# Altium PCB PCB1.PcbDoc (part 1 of 2)
Units mm, origin at the board's own origin, x right, y up, seen from the top; angles counter-clockwise.
Board outline 54 x 42.04 mm, 4 copper layers (Top Layer, Int1 (GND), Int2 (PWR), Bottom Layer), stack 1.527 mm thick; 51 components, 50 nets, 220 pads, 98 vias.
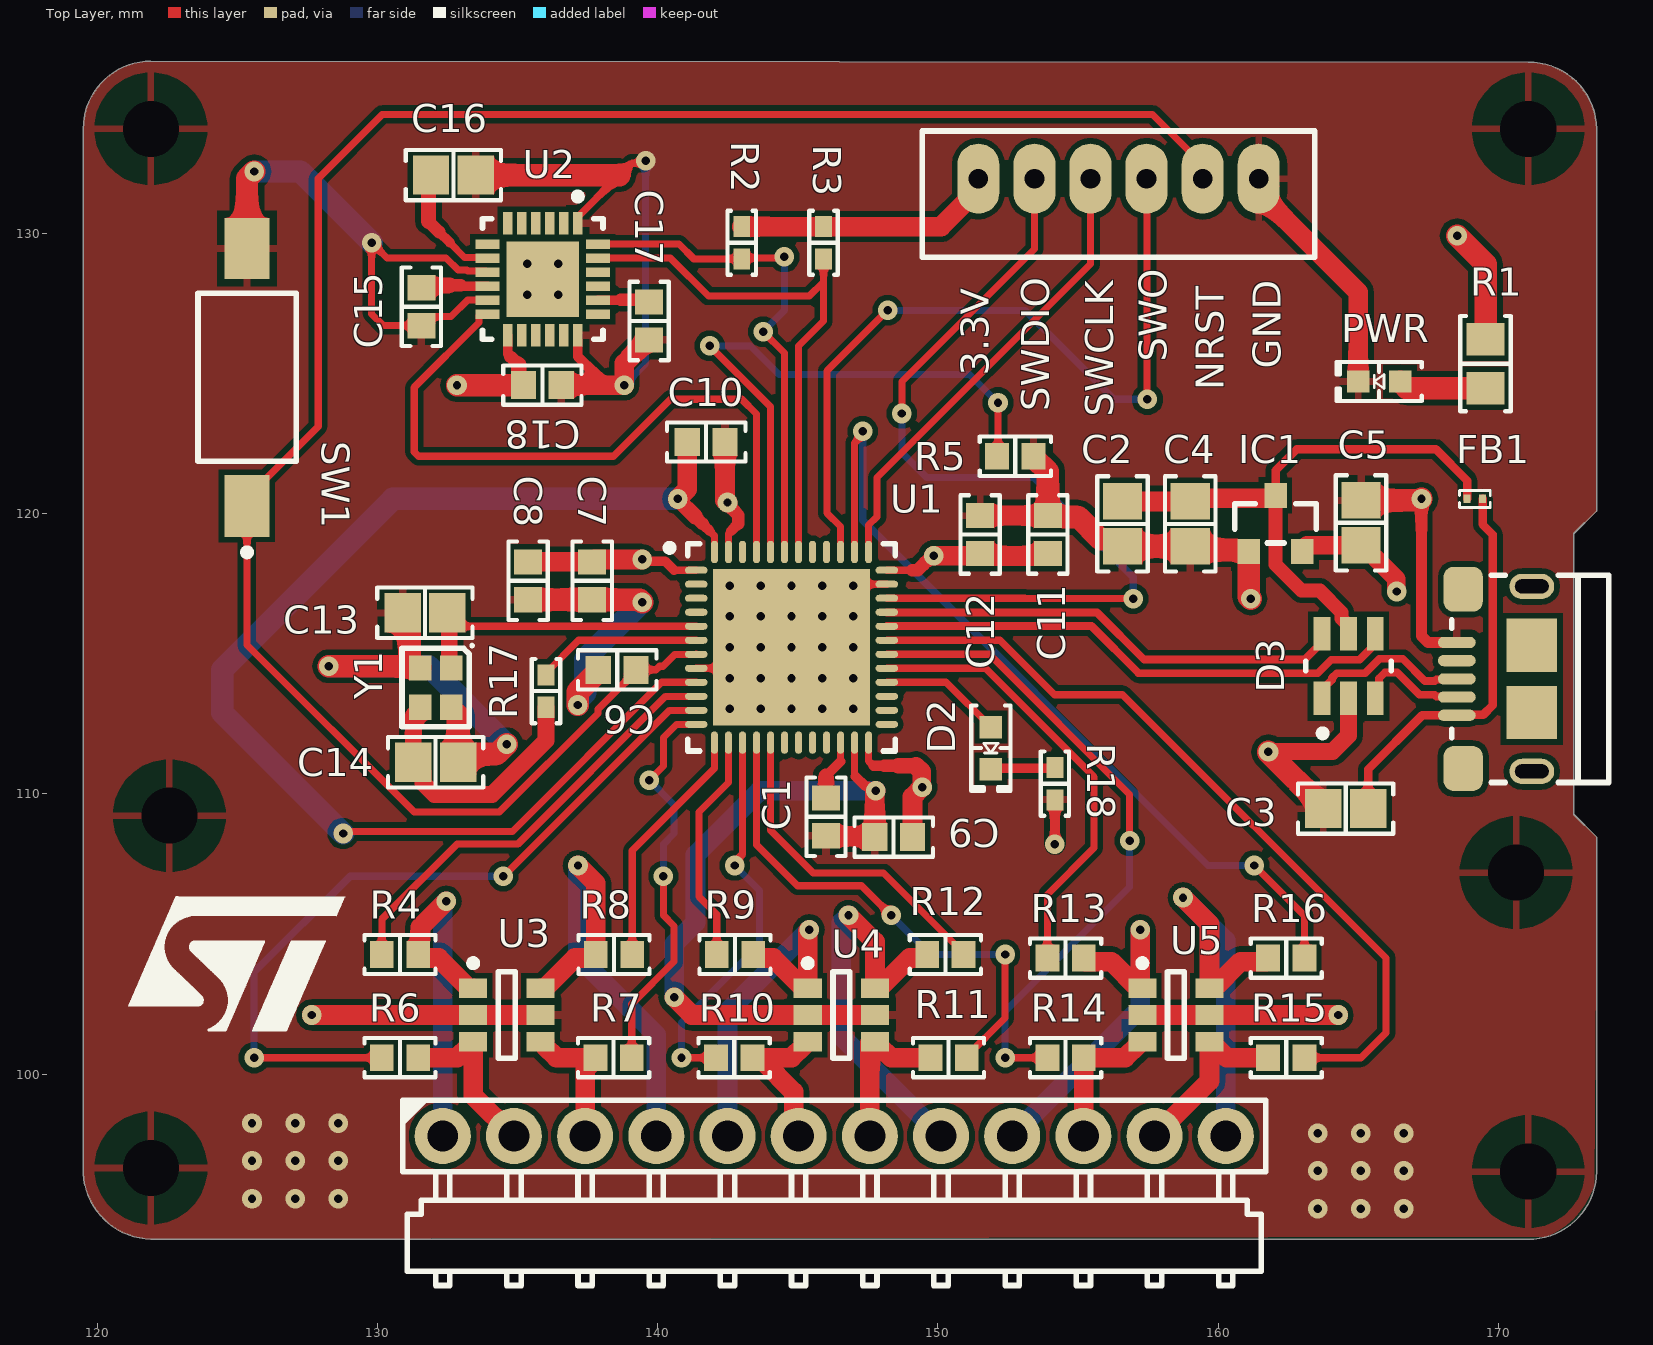
[diagram p0: Top Layer view]
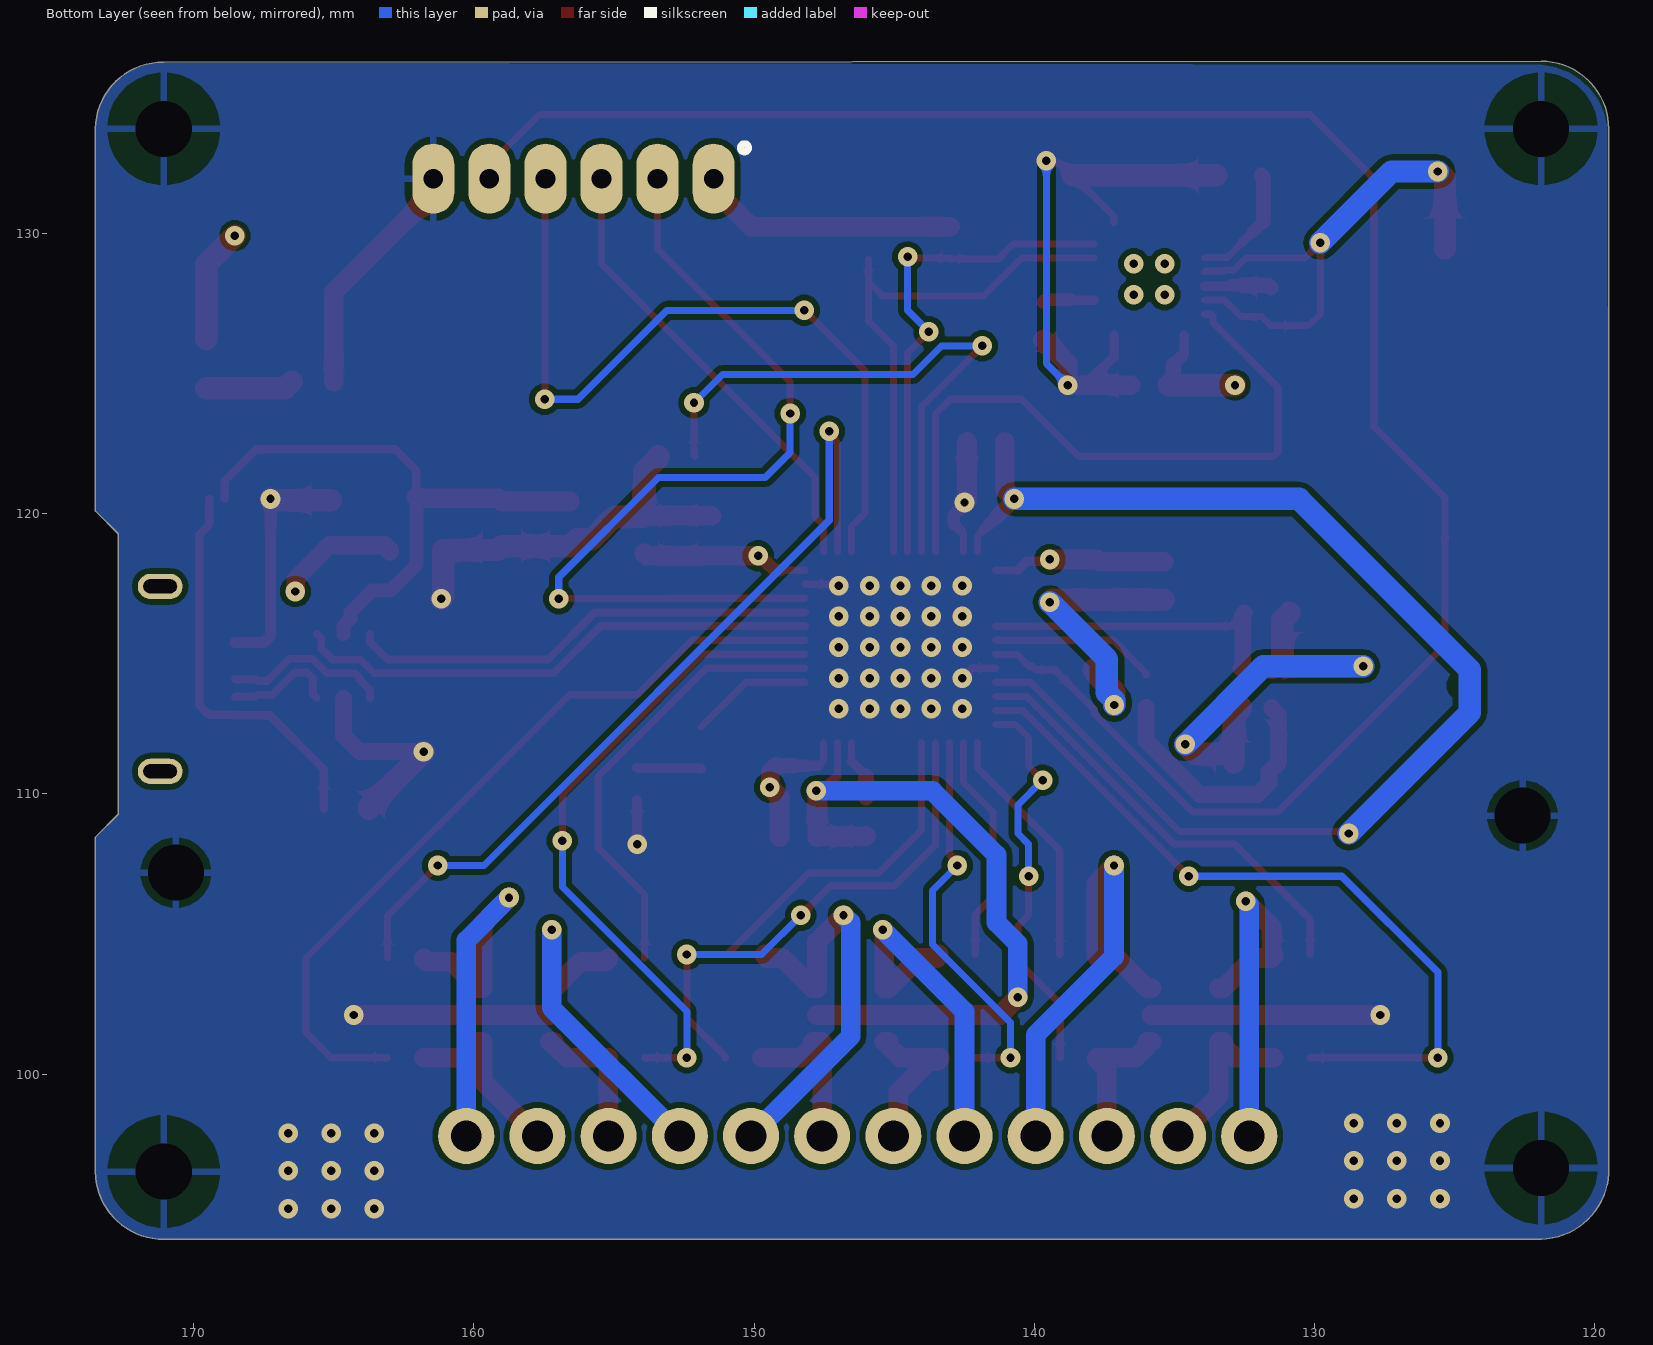
[diagram p1: Bottom Layer view, seen from below]
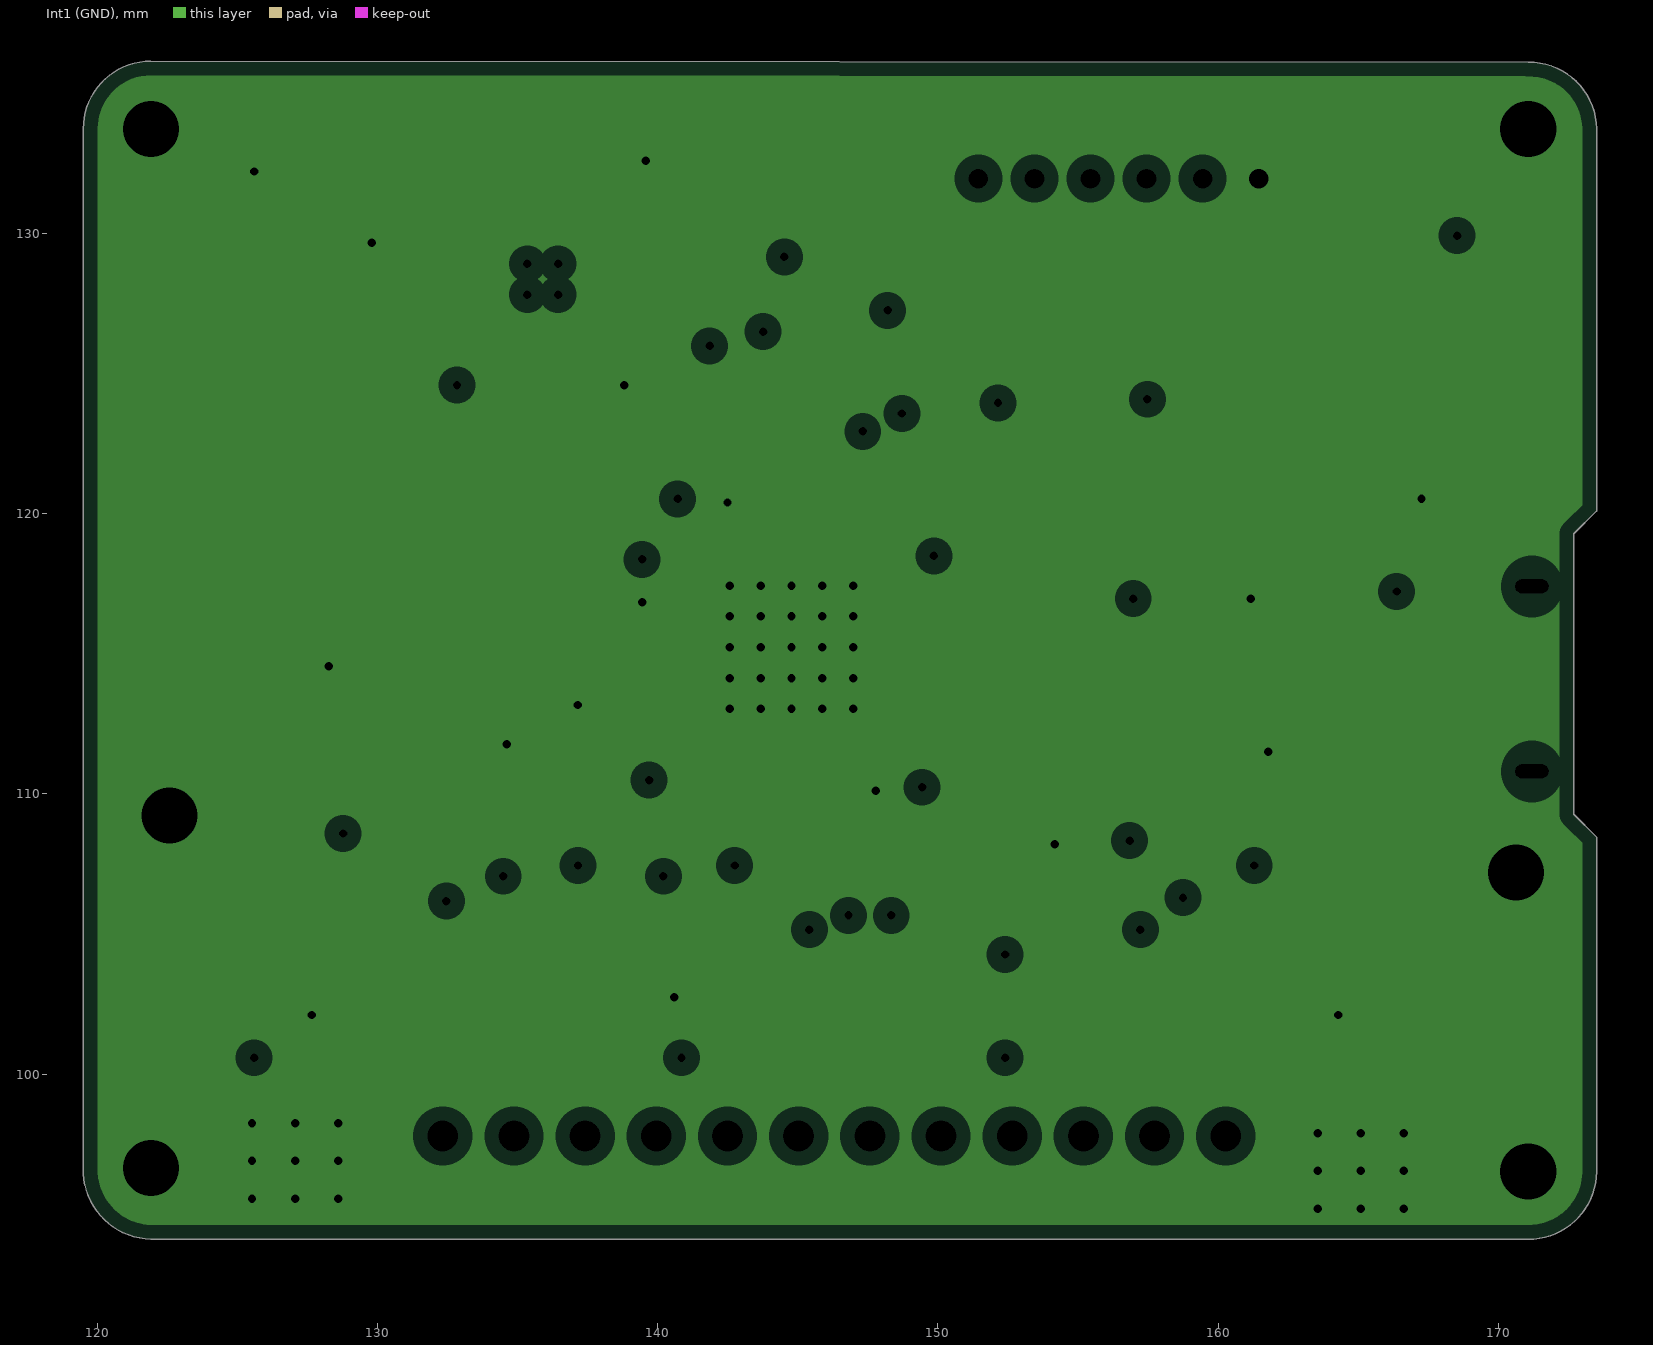
[diagram p2: Int1 (GND), clearances drawn from the general rule]
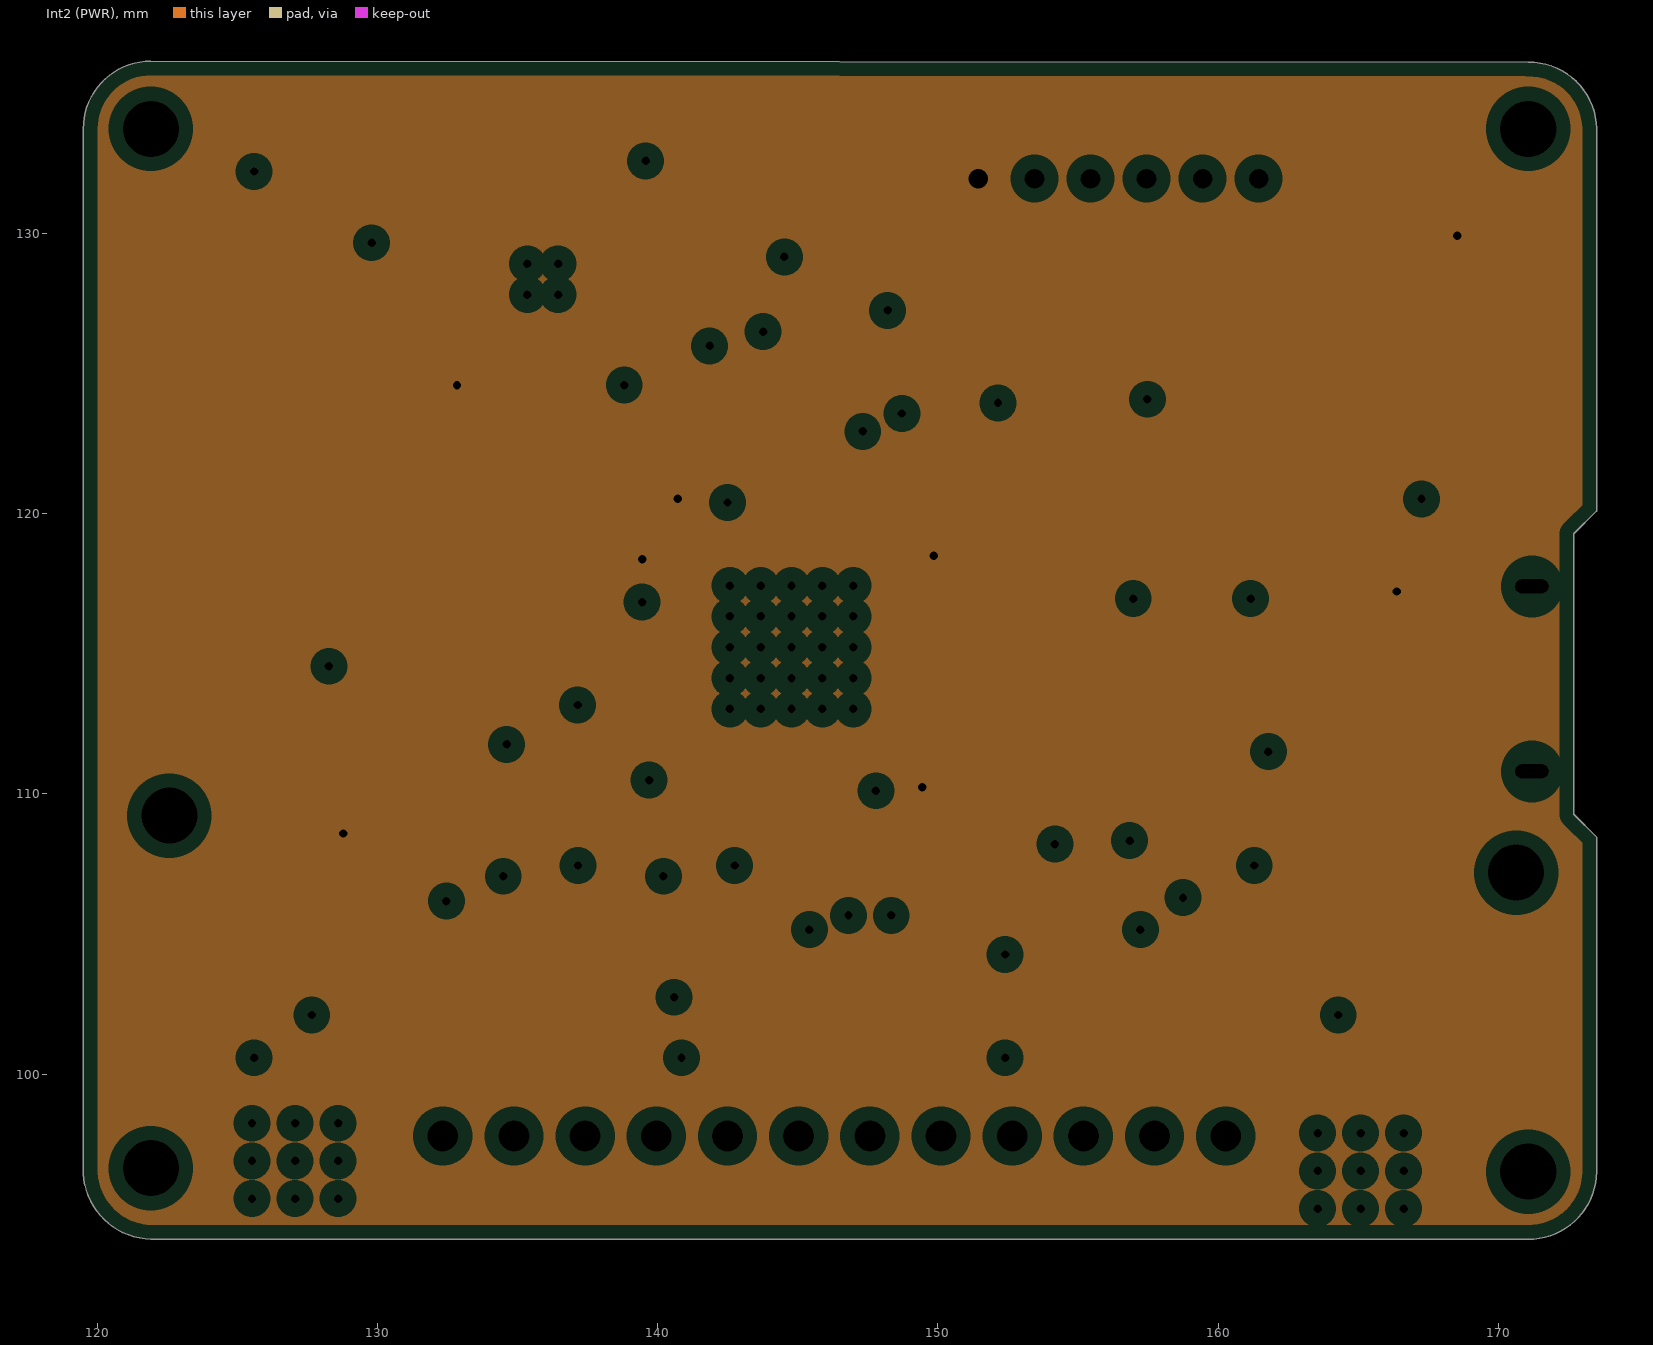
[diagram p3: Int2 (PWR), clearances drawn from the general rule]

## Layer stack, top to bottom
Top Solder: solder mask 0.0254, SM-001, Dk 4
Top Layer: signal copper 0.0175
Dielectric 2: prepreg 0.196, PP-017, Dk 4.56
Int1 (GND): plane copper 0.035, net GND
Dielectric 3: core 1.03, Core-039, Dk 4.6
Int2 (PWR): plane copper 0.035, net +3.3
Dielectric 4: prepreg 0.196, PP-017, Dk 4.56
Bottom Layer: signal copper 0.0175
Bottom Solder: solder mask 0.0254, SM-001, Dk 4

## Board outline
119.507,96.647 119.507,133.731 cw(c121.92,133.731) 121.92,136.144 171.069,136.107 cw(c171.1,133.7) 173.507,133.731 173.507,120.091 172.695,119.278 172.695,109.271 173.507,108.458 173.507,96.52 cw(c171.082,96.532) 171.069,94.107 121.92,94.107 cw(c121.983,96.584)

## Design rules (kind name [scope] priority, off if disabled: settings)
Clearance [All] p1: gap=0.2 ignorepadtopadclearanceinfootprint=FALSE except(0: Arc-Hole Track-Hole SMDPad-Hole THPad-Hole Via-Hole Fill-Hole Poly-Hole Region-Hole Text-Hole; 0.15: Arc-SMDPad Track-SMDPad SMDPad-SMDPad; 0.3: Arc-THPad Track-THPad SMDPad-THPad THPad-THPad)
DiffPairsRouting [All] p1: maxlimit=0.203 minlimit=0.203 mostfreqgap=0.203 toplayer_minwidth=0.282 toplayer_maxwidth=0.282 toplayer_prefwidth=0.282 bottomlayer_minwidth=0.282 bottomlayer_maxwidth=0.282 bottomlayer_prefwidth=0.282 impedanceprofiledriven=TRUE impedanceprofileid={8CF5B2EE-CE53-4D16-A48A-B350567C6581} impedanceprofilevalue=90.000000 maxuncoupledlength=12.7
HoleSize [All] p1: absolutevalues=TRUE maxlimit=3.5 minlimit=0.025 maxpercent=80.000 minpercent=20.000
MinimumSolderMaskSliver [All] p1: minsoldermaskwidth=0.04
PlaneClearance [All] p1: clearance=0.508
PlaneConnect [All] p1: pad.planeconnectstyle=Relief pad.reliefexpansion=0.508 pad.reliefentries=4 pad.reliefconductorwidth=0.254 pad.reliefairgap=0.254 via.planeconnectstyle=Direct via.reliefexpansion=0.508 via.reliefentries=4 via.reliefconductorwidth=0.254 via.reliefairgap=0.254
PolygonConnect [All] p1: thpad.connectstyle=Relief thpad.reliefconductorwidth=0.254 thpad.reliefentries=4 thpad.polygonreliefangle="90 Angle" thpad.airgapwidth=0.254 smdpad.connectstyle=Relief smdpad.reliefconductorwidth=0.254 smdpad.reliefentries=4 smdpad.polygonreliefangle="90 Angle" smdpad.airgapwidth=0.254 via.connectstyle=Direct via.reliefconductorwidth=0.254 via.reliefentries=4 via.polygonreliefangle="90 Angle" via.airgapwidth=0.254
RoutingVias [All] p1: holewidth=0.3 width=0.7 viastyle="Through Hole" minholewidth=0.25 minwidth=0.6 maxholewidth=0.3 maxwidth=0.7
SilkToSolderMaskClearance [IsPad] p1: minsilkscreentomaskgap=0 clearancetoexposedcopper=TRUE
SolderMaskExpansion [All] p1: expansion=0.102 istentingtop=FALSE
UnRoutedNet [All] p1: checkbadconnections=TRUE
Width [All] p1: maxlimit=1 minlimit=0.2 preferedwidth=0.3
23 further rules are at their usual default settings.

## Classes and differential pairs
differential pair USB_D: +USB_D_P -USB_D_N
differential pair USB_D_IN: +USB_D_IN_P -USB_D_IN_N

## Components (designator, comment, footprint, x,y, rotation, side; value= is the part's Value field where it differs from the comment)
C1 "100nf" "CAP 0603_1608" 146.01,109.18 r270 top
C2 "2C2uF" "CAP 0805_2012" 156.591,119.634 r90 top
C3 "2C2uF" "CAP 0805_2012" 164.554,109.474 r0 top
C4 "1uF" "CAP 0805_2012" 159.004,119.634 r270 top
C5 "1uF" "CAP 0805_2012" 165.1,119.672 r90 top
C6 "100nf" "CAP 0603_1608" 138.557,114.427 r180 top
C7 "4C7uf" "CAP 0603_1608" 137.668,117.602 r270 top
C8 "100nf" "CAP 0603_1608" 135.382,117.602 r270 top
C9 "100nf" "CAP 0603_1608" 148.423,108.458 r180 top
C10 "100nf" "CAP 0603_1608" 141.732,122.555 r0 top
C11 "100nf" "CAP 0603_1608" 153.924,119.253 r90 top
C12 "100nf" "CAP 0603_1608" 151.511,119.253 r90 top
C13 "6 pF" "CAP 0805_2012" 131.699,116.459 r180 top
C14 "6 pF" "CAP 0805_2012" 132.08,111.125 r0 top
C15 "0C1uF" "CAP 0603_1608" 131.572,127.381 r270 top
C16 "10nF" "CAP 0805_2012" 132.715,132.08 r0 top
C17 "2C2nF" "CAP 0603_1608" 139.7,126.873 r270 top
C18 "0C1uF" "CAP 0603_1608" 135.89,124.587 r0 top
D2 "Green" "LED 0603_1608 GREEN" 151.892,111.633 r270 top
D3 "USBLC6-4SC6" FP-SOT23-6L-MFG 164.658,114.561 r90 top value=3pF
FB1 "33 Ohms @ 100 MHz" "FER 0201_0603" 169.164,120.523 r0 top
IC1 "AP7313-33SRG-7" "DIODES SOT-23-3" 162.052,119.65 r90 top
J1 "10118193-0001LF" "FCI USB 10118193-0001LF" 171.146,114.103 r270 top
J2 "M20-9961245" "HARWIN M20-9961245" 146.304,97.79 r0 top
J3 "B6B-PH-K(LF)(SN)" "JST B6B-PH-K" 156.448,131.953 r0 top
PWR "Red" "LED 0603_1608 RED" 165.747,124.714 r180 top (schematic designator D1)
R1 "1 kOhms" "RES 0805_2012" 169.545,125.349 r270 top
R2 "4R75K" "RES 0402_1005" 143.002,129.667 r270 top
R3 "4R75K" "RES 0402_1005" 145.923,129.667 r270 top
R4 "150R" "RES 0603_1608" 130.81,104.267 r180 top
R5 "10KR" "RES 0603_1608" 152.766,122.047 r180 top
R6 "150R" "RES 0603_1608" 130.81,100.584 r180 top
R7 "150R" "RES 0603_1608" 138.43,100.584 r0 top
R8 "150R" "RES 0603_1608" 138.445,104.267 r0 top
R9 "150R" "RES 0603_1608" 142.763,104.267 r180 top
R10 "150R" "RES 0603_1608" 142.733,100.584 r180 top
R11 "150R" "RES 0603_1608" 150.383,100.584 r0 top
R12 "150R" "RES 0603_1608" 150.271,104.267 r0 top
R13 "150R" "RES 0603_1608" 154.559,104.14 r180 top
R14 "150R" "RES 0603_1608" 154.559,100.584 r180 top
R15 "150R" "RES 0603_1608" 162.433,100.584 r0 top
R16 "150R" "RES 0603_1608" 162.433,104.14 r0 top
R17 "150R" "RES 0402_1005" 136.017,113.665 r90 top
R18 "1K" "RES 0402_1005" 154.178,110.363 r270 top
SW1 "FSMSM" TECO-FSMSM-2_V 125.349,124.864 r90 top
U1 "STM32F411CEU6" STM-UFQFPN48_L 144.78,115.23 r0 top
U2 "MPU-6050" IS-QFN-24_V 135.902,128.365 r270 top
U3 "MMQA6V2T1G" ONSC-SC-74-6-318F-05_V 134.62,102.108 r0 top
U4 "MMQA6V2T1G" ONSC-SC-74-6-318F-05_V 146.558,102.108 r0 top
U5 "MMQA6V2T1G" ONSC-SC-74-6-318F-05_V 158.496,102.108 r0 top
Y1 "20MHz" "KYOCERA CX2016DB" 132.08,113.792 r270 top

## Footprints (in the part's own frame and the unit in brackets; to place one, negate y for a bottom-side part, rotate by r counter-clockwise, add the part's x,y. Pads: shape width x height; smd on the part's side, far side on the other; paste and mask are expansions set on the pad)
"CAP 0603_1608" [mm] "Chip Capacitor, 2-Leads, Body 1.60x0.80mm, IPC Medium Density"
  rect 0.9x1 smd: 1(-0.675,0) 2(0.675,0)
  silkscreen extent -1.4,-0.7 1.4,0.7, body extent -0.8,-0.41 0.8,0.41, height 0.82
"CAP 0805_2012" [mm] "Chip Capacitor, 2-Leads, Body 2.00x1.20mm, IPC Medium Density"
  rect 1.3x1.4 smd: 1(-0.8,0) 2(0.8,0)
  silkscreen extent -1.7,-0.9 1.7,0.9, body extent -1,-0.64 1,0.64, height 1.26
"DIODES SOT-23-3" [mm] "SOT23, 3-Leads, Body 2.90x2.40mm, Pitch 0.95mm, IPC Medium Density"
  rect 0.9x0.8 smd: 1(-1,0.95) 2(-1,-0.95) 3(1,0)
  silkscreen extent -0.7,-1.45 0.7,1.45, body extent -1.41,-1.45 1.41,1.45, height 1.5
"FCI USB 10118193-0001LF" [mm] "USB 2.0 Type B Micro"
  oval 0.4x1.35 smd: 1(1.3,-2.625) 2(0.65,-2.625) 3(0,-2.625) 4(-0.65,-2.625) 5(-1.3,-2.625)
  oval 0.9x1.6 hole 0.5 slot 1.2 at 90 deg: S(-3.3,0.05) S(3.3,0.05)
  rrect50% 1.6x1.4 smd: S(-3.2,-2.4) S(3.2,-2.4)
  rect 1.9x1.8 smd: S(-1.2,0.05) S(1.2,0.05)
  silkscreen extent -3.7,-2.8 3.7,2.8, body extent -3.93,-2.9 3.93,2.76, height 2.78
"FER 0201_0603" [mm] "Chip Inductor, 2-Leads, Body 0.60x0.30mm, IPC Medium Density"
  rect 0.25x0.3 smd: 1(-0.275,0) 2(0.275,0)
  silkscreen extent -0.55,-0.3 0.55,0.3, body extent -0.3,-0.15 0.3,0.15, height 0.29
FP-SOT23-6L-MFG [mm]
  rect 1.2x0.6 smd paste+0 mask+0: 1(-1.15,0.95) 2(-1.15,0) 3(-1.15,-0.95) 4(1.15,-0.95) 5(1.15,0) 6(1.15,0.95)
  silkscreen extent -2.52,-1.53 0.18,1.53, body extent -1.85,-1.63 1.85,1.63, height 0.25
"HARWIN M20-9961245" [mm] "2.54mm DIL PC TAIL PIN HEADER ASSEMBLY"
  round 2 hole 1.1: 1(-13.97,0) 2(-11.43,0) 3(-8.89,0) 4(-6.35,0) 5(-3.81,0) 6(-1.27,0) 7(1.27,0) 8(3.81,0) 9(6.35,0) 10(8.89,0) 11(11.43,0) 12(13.97,0)
  silkscreen extent -15.4,-5.33 15.4,1.3, body extent -15.24,-10.9 15.24,0.32, height 2.54
IS-QFN-24_V [mm] "QFN, 24-Leads, Body 4x4mm, Pitch 0.5mm, Thermal Pad 2.7x2.6mm"
  rect 0.8x0.35 smd: 1(-2,1.25) 2(-2,0.75) 3(-2,0.25) 4(-2,-0.25) 5(-2,-0.75) 6(-2,-1.25) 13(2,-1.25) 14(2,-0.75) 15(2,-0.25) 16(2,0.25) 17(2,0.75) 18(2,1.25)
  rect 0.35x0.85 smd mask+0.102: 7(-1.25,-1.975) 8(-0.75,-1.975) 9(-0.25,-1.975) 10(0.25,-1.975) 11(0.75,-1.975) 12(1.25,-1.975) 19(1.25,1.975) 20(0.75,1.975) 21(0.25,1.975) 22(-0.25,1.975) 23(-0.75,1.975) 24(-1.25,1.975)
  rect 2.7x2.6 smd: 25(0,0)
  silkscreen extent -3.07,-2.15 2.15,2.15, body extent -2,-2 2,2, height 0.95
"JST B6B-PH-K" [mm]
  oval 1.5x2.5 hole 0.7: 1(-5,0) 2(-3,0) 3(-1,0) 4(1,0) 5(3,0) 6(5,0)
  silkscreen extent -7,-2.8 7,1.7, body extent -6.95,-2.8 6.95,1.7, height 6
"KYOCERA CX2016DB" [mm] "Crystal, 4-Leads, Body 1.60x2.00mm, Pitch 1.40mm, IPC Medium Density"
  rect 0.9x0.8 smd: 1(-0.7,0.55) 2(-0.7,-0.55) 3(0.7,-0.55) 4(0.7,0.55)
  silkscreen extent -1.55,-1.2 1.4,1.35, body extent -1.02,-0.82 1.03,0.83, height 0.4
"LED 0603_1608 GREEN" [mm] "Chip Diode, 2-Leads, Body 1.60x0.80mm, IPC Medium Density"
  rect 0.8x0.8 smd: 1(-0.75,0) 2(0.75,0)
  silkscreen extent -1.52,-0.7 1.52,0.7, body extent -0.8,-0.4 0.8,0.4, height 0.53
"LED 0603_1608 RED" [mm] "Chip Diode, 2-Leads, Body 1.60x0.80mm, IPC Medium Density"
  rect 0.8x0.8 smd: 1(-0.75,0) 2(0.75,0)
  silkscreen extent -1.52,-0.7 1.52,0.7, body extent -0.8,-0.4 0.8,0.4, height 0.53
ONSC-SC-74-6-318F-05_V [mm] "SOT23, 6-Leads, Body 3x1.5mm, Pitch 0.95mm"
  rect 1x0.7 smd: 1(-1.2,0.95) 2(-1.2,0) 3(-1.2,-0.95) 4(1.2,-0.95) 5(1.2,0) 6(1.2,0.95)
  silkscreen extent -1.32,-1.55 0.3,1.97, body extent -0.75,-1.5 0.75,1.5, height 1.1
"RES 0402_1005" [mm] "Chip Resistor, 2-Leads, Body 1.0x0.5mm, IPC Medium Density"
  rect 0.75x0.6 smd: 1(-0.575,0) 2(0.575,0)
  silkscreen extent -1.14,-0.51 1.14,0.51, body extent -0.5,-0.25 0.5,0.25, height 0.35
"RES 0603_1608" [mm] "Chip Resistor, 2-Leads, Body 1.60x0.80mm, IPC Medium Density"
  rect 0.85x0.95 smd: 1(-0.65,0) 2(0.65,0)
  silkscreen extent -1.27,-0.7 1.27,0.7, body extent -0.8,-0.4 0.8,0.4, height 0.45
"RES 0805_2012" [mm] "Chip Resistor, 2-Leads, Body 2.00x1.25mm, IPC Medium Density"
  rect 1.15x1.35 smd: 1(-0.875,0) 2(0.875,0)
  silkscreen extent -1.7,-0.9 1.7,0.9, body extent -1,-0.62 1,0.63, height 0.6
STM-UFQFPN48_L [mm] "QFN, 48-Leads, Body 7.1x7.1mm, Pitch 0.5mm, Thermal Pad 5.6x5.6mm, IPC High Density"
  oval 0.8x0.25 smd: 1(-3.4,2.75) 2(-3.4,2.25) 3(-3.4,1.75) 4(-3.4,1.25) 5(-3.4,0.75) 6(-3.4,0.25) 7(-3.4,-0.25) 8(-3.4,-0.75) 9(-3.4,-1.25) 10(-3.4,-1.75) 11(-3.4,-2.25) 12(-3.4,-2.75) 25(3.4,-2.75) 26(3.4,-2.25) 27(3.4,-1.75) 28(3.4,-1.25) 29(3.4,-0.75) 30(3.4,-0.25) 31(3.4,0.25) 32(3.4,0.75) 33(3.4,1.25) 34(3.4,1.75) 35(3.4,2.25) 36(3.4,2.75)
  oval 0.25x0.8 smd: 13(-2.75,-3.4) 14(-2.25,-3.4) 15(-1.75,-3.4) 16(-1.25,-3.4) 17(-0.75,-3.4) 18(-0.25,-3.4) 19(0.25,-3.4) 20(0.75,-3.4) 21(1.25,-3.4) 22(1.75,-3.4) 23(2.25,-3.4) 24(2.75,-3.4) 37(2.75,3.4) 38(2.25,3.4) 39(1.75,3.4) 40(1.25,3.4) 41(0.75,3.4) 42(0.25,3.4) 43(-0.25,3.4) 44(-0.75,3.4) 45(-1.25,3.4) 46(-1.75,3.4) 47(-2.25,3.4) 48(-2.75,3.4)
  rect 5.6x5.6 smd: 49(0,0)
  silkscreen extent -4.47,-3.7 3.7,3.7, body extent -3.55,-3.55 3.55,3.55, height 0.6
TECO-FSMSM-2_V [mm] "SMD, 2-Leads, Body 6x3.5mm, Pitch 9.19mm"
  rect 2.2x1.6 smd: 1(-4.595,0)
  rect 2.18x1.6 smd: 2(4.595,0)
  silkscreen extent -6.37,-1.75 3,1.75, body extent -4.98,-1.75 4.98,1.75, height 4.4

## Part data
C1 C6 C8 C9 C10 C11 C12: library part 6R3X14W104MV4T, "CAP CER 0.1UF 6.3V X7R 0603", Capacitance="0.1 µF", Device Package="0603 (1608 Metric)", manufacturer="Johanson Dielectrics Inc.", Operating Temperature="-55°C ~ 125°C", Supplier Part Number 1=709-1009-1-ND, Temperature Coefficient=X7R, Tolerance=±20%, Voltage - Rated=6.3V, Applications="Bypass, Decoupling", componentlink1description=Datasheet, componentlink1url=https://www.johansondielectrics.com/downloads/x2y-filter-and-decoupling-capacitors.pdf, componentlink2description="DigiKey Link", componentlink2url=https://www.digikey.com/en/products/detail/johanson-dielectrics-inc/6R3X14W104MV4T/1556331, Features="Low ESL (X2Y)", lastupdated="2/9/2024 8:10:30 PM", Lifecycle Status=Active, Minimum Order=1, Mounting Type="Surface Mount, MLCC", Package / Case="0603 (1608 Metric)", packaging=TapeAndReel, Part Number=6R3X14W104MV4T, Part Status=Active, partid=2650, price=0.08, series=X2Y®, Size / Dimension="0.064\" L x 0.035\" W (1.63mm x 0.89mm)", Supplier 1=DigiKey, Thickness (Max)="0.026\" (0.66mm)"
C2 C3: library part EMK212BJ225KGHT, "CAP CER 2.2UF 16V X5R 0805", Capacitance="2.2 µF", Device Package="0805 (2012 Metric)", manufacturer="Taiyo Yuden", Operating Temperature="-55°C ~ 85°C", Ratings=AEC-Q200, Supplier Part Number 1=587-3323-1-ND, Temperature Coefficient=X5R, Tolerance=±10%, Voltage - Rated=16V, Applications=Automotive, componentlink1description=Datasheet, componentlink1url="https://ds.yuden.co.jp/TYCOMPAS/ut/detail?pn=EMK212BJ225KGHT  &u=M", componentlink2description="DigiKey Link", componentlink2url=https://www.digikey.com/en/products/detail/taiyo-yuden/EMK212BJ225KGHT/4157459, lastupdated="2/9/2024 8:16:06 PM", Lifecycle Status=Active, Minimum Order=1, Mounting Type="Surface Mount, MLCC", Package / Case="0805 (2012 Metric)", packaging=TapeAndReel, Part Number=EMK212BJ225KGHT, Part Status=Active, partid=3646, price=0.03, series=M, Size / Dimension="0.079\" L x 0.049\" W (2.00mm x 1.25mm)", Supplier 1=DigiKey, Thickness (Max)="0.053\" (1.35mm)"
C4 C5: library part C0805C105K4RECAUTO, "CAP CER 0805 1UF 16V X7R 10%", Capacitance="1 µF", Device Package="0805 (2012 Metric)", manufacturer=KEMET, Operating Temperature="-55°C ~ 125°C", Ratings=AEC-Q200, Supplier Part Number 1=399-C0805C105K4RECAUTOCT-ND, Temperature Coefficient=X7R, Tolerance=±10%, Voltage - Rated=16V, Applications="Automotive, ESD Protection", componentlink1description=Datasheet, componentlink1url=https://connect.kemet.com:7667/gateway/IntelliData-ComponentDocumentation/1.0/download/datasheet/C0805C105K4RECAUTO, componentlink2description="DigiKey Link", componentlink2url=https://www.digikey.com/en/products/detail/kemet/C0805C105K4RECAUTO/8646678, lastupdated="2/9/2024 8:14:56 PM", Lifecycle Status=Active, Minimum Order=1, Mounting Type="Surface Mount, MLCC", Package / Case="0805 (2012 Metric)", packaging=TapeAndReel, Part Number=C0805C105K4RECAUTO, Part Status=Active, partid=46500, price=0.04, series="ESD SMD Auto X7R", Size / Dimension="0.079\" L x 0.049\" W (2.00mm x 1.25mm)", Supplier 1=DigiKey, Thickness (Max)="0.055\" (1.40mm)"
C7: library part 06036D475KAT4A, "CAP CER 4.7UF 6.3V X5R 0603", Capacitance=4.7µF, Device Package="0603 (1608 Metric)", manufacturer="AVX Corporation", Operating Temperature="-55°C ~ 85°C", Supplier Part Number 1=478-10813-1-ND, Temperature Coefficient=X5R, Tolerance=±10%, Voltage - Rated=6.3V, Applications="General Purpose", componentlink1description=Datasheet, componentlink1url=http://datasheets.avx.com/cx5r.pdf, componentlink2description="DigiKey Link", componentlink2url=http://digikey.com/product-detail/en/avx-corporation/06036D475KAT4A/478-10813-1-ND/7536337, lastupdated="9/2/2020 1:03:34 AM", Lifecycle Status=Active, Minimum Order=1, Mounting Type="Surface Mount, MLCC", Package / Case="0603 (1608 Metric)", packaging=TapeAndReel, Part Number=06036D475KAT4A, Part Status=Active, partid=2929, price=0.02, series=-, Size / Dimension="0.063\" L x 0.032\" W (1.60mm x 0.81mm)", Supplier 1=DigiKey, Thickness (Max)="0.037\" (0.94mm)"
C13 C14: library part CC0805CRNPO9BN6R0, "CAP CER 6PF 50V C0G/NPO 0805", Device Package="0805 (2012 Metric)", manufacturer=Yageo, Operating Temperature="-55°C ~ 125°C", Supplier Part Number 1=311-4149-1-ND, Temperature Coefficient="C0G, NP0", Tolerance=±0.25pF, Voltage - Rated=50V, Applications="General Purpose", Capacitance="6 pF", componentlink1description=Datasheet, componentlink1url=https://www.yageo.com/upload/media/product/productsearch/datasheet/mlcc/UPY-GP_NP0_16V-to-50V_17.pdf, componentlink2description="DigiKey Link", componentlink2url=https://www.digikey.com/en/products/detail/yageo/CC0805CRNPO9BN6R0/5883903, lastupdated="2/9/2024 8:15:48 PM", Lifecycle Status=Active, Minimum Order=1, Mounting Type="Surface Mount, MLCC", Package / Case="0805 (2012 Metric)", packaging=TapeAndReel, Part Number=CC0805CRNPO9BN6R0, Part Status=Active, partid=10689, price=0.02, series=CC, Size / Dimension="0.079\" L x 0.049\" W (2.00mm x 1.25mm)", Supplier 1=DigiKey, Thickness (Max)="0.028\" (0.70mm)"
C15 C18: library part C0603X104K8RAC7867, "CAP CER 0.1UF 10V X7R 0603", Capacitance="0.1 µF", Device Package="0603 (1608 Metric)", manufacturer=KEMET, Operating Temperature="-55°C ~ 125°C", Supplier Part Number 1=399-C0603X104K8RAC7867CT-ND, Temperature Coefficient=X7R, Tolerance=±10%, Voltage - Rated=10V, Applications="Boardflex Sensitive", componentlink1description=Datasheet, componentlink1url=https://api.kemet.com/component-edge/download/datasheet/C0603X104K8RACTU.pdf, componentlink2description="DigiKey Link", componentlink2url=https://www.digikey.com/en/products/detail/kemet/C0603X104K8RAC7867/1842285, Features="Soft Termination", lastupdated="2/9/2024 8:09:53 PM", Lifecycle Status=Active, Minimum Order=1, Mounting Type="Surface Mount, MLCC", Package / Case="0603 (1608 Metric)", packaging=TapeAndReel, Part Number=C0603X104K8RAC7867, Part Status=Active, partid=39072, price=0.07, series="SMD Comm X7R Flex", Size / Dimension="0.063\" L x 0.031\" W (1.60mm x 0.80mm)", Supplier 1=DigiKey, Thickness (Max)="0.034\" (0.87mm)"
C16: library part 0805ZC103KAT2A, "CAP CER 10000PF 10V X7R 0805", Capacitance=10000pF, Device Package="0805 (2012 Metric)", manufacturer="AVX Corporation", Operating Temperature="-55°C ~ 125°C", Supplier Part Number 1=478-11396-1-ND, Temperature Coefficient=X7R, Tolerance=±10%, Voltage - Rated=10V, Applications="General Purpose", componentlink1description=Datasheet, componentlink1url=http://datasheets.avx.com/X7RDielectric.pdf, componentlink2description="DigiKey Link", componentlink2url=http://digikey.com/product-detail/en/avx-corporation/0805ZC103KAT2A/478-11396-1-ND/8019147, lastupdated="9/2/2020 1:04:15 AM", Lifecycle Status=Active, Minimum Order=1, Mounting Type="Surface Mount, MLCC", Package / Case="0805 (2012 Metric)", packaging=TapeAndReel, Part Number=0805ZC103KAT2A, Part Status=Active, partid=15514, price=0.05, series=-, Size / Dimension="0.079\" L x 0.049\" W (2.01mm x 1.25mm)", Supplier 1=DigiKey, Thickness (Max)="0.037\" (0.94mm)"
C17: library part C0603X222K5RACAUTO, "CAP CER 2200PF 50V X7R 0603", Capacitance="2200 pF", Device Package="0603 (1608 Metric)", manufacturer=KEMET, Operating Temperature="-55°C ~ 125°C", Ratings=AEC-Q200, Supplier Part Number 1=399-16489-1-ND, Temperature Coefficient=X7R, Tolerance=±10%, Voltage - Rated=50V, Applications="Automotive, Boardflex Sensitive", componentlink1description=Datasheet, componentlink1url=https://api.kemet.com/component-edge/download/datasheet/C0603X222K5RACAUTO.pdf, componentlink2description="DigiKey Link", componentlink2url=https://www.digikey.com/en/products/detail/kemet/C0603X222K5RACAUTO/7803592, Features="Soft Termination", lastupdated="2/9/2024 8:10:18 PM", Lifecycle Status=Active, Minimum Order=1, Mounting Type="Surface Mount, MLCC", Package / Case="0603 (1608 Metric)", packaging=TapeAndReel, Part Number=C0603X222K5RACAUTO, Part Status=Active, partid=11380, price=0.06, series="SMD Auto X7R Flex", Size / Dimension="0.063\" L x 0.031\" W (1.60mm x 0.80mm)", Supplier 1=DigiKey, Thickness (Max)="0.037\" (0.95mm)"
D2: library part 150060VS75020, "WL-SMCW SMT MONO-COLOR CHIP LED", Current - Test=20mA, Device Package="0603 (1608 Metric)", Lens Color=Colorless, manufacturer="Würth Elektronik", Millicandela Rating=50mcd, Supplier Device Package=0603, Supplier Part Number 1=732-150060VS75020CT-ND, Voltage - Forward (Vf) (Typ)=2V, Color=Green, componentlink2description="DigiKey Link", componentlink2url=https://www.digikey.com/en/products/detail/würth-elektronik/150060VS75020/10468264, Configuration=Independent, Height (Max)=0.45mm, lastupdated="3/11/2024 7:51:11 AM", Lens Size="1.10mm x 0.80mm", Lens Style="Rectangle with Flat Top", Lens Transparency=Clear, Lifecycle Status=Active, Minimum Order=1, Mounting Type="Surface Mount", Package / Case="0603 (1608 Metric)", packaging=TapeAndReel, Part Number=150060VS75020, Part Status=Active, partid=588, price=0.19, series=WL-SMCW, Size / Dimension="1.60mm L x 0.80mm W", Supplier 1=DigiKey, Viewing Angle=140°, Wavelength - Dominant=570nm, Wavelength - Peak=572nm
D3: library part CMP-2000-07370-2, "TVS DIODE 5.25V 17V SOT23-6", Breakdown Voltage=6V, Capacitance=3pF, Clamping Voltage=17V, manufacturer=STMicroelectronics, Max Junction Temp=+125°C, Package=SOT23-6L, Peak Pulse Power=130W, Temperature="-40°C to +125°C", Temperature Range Low=-40°C, Automotive=No, Category=Diode, componentlink2description=Datasheet, componentlink2url=https://upverter.com/datasheet/23dc4ffb028d868909e80577610284b194f13213.pdf, Device Class L1="Circuit Protection", Device Class L2="ESD and Circuit Protection ICs", Device Class L3=unset, Digikey Description="TVS DIODE 5.25V 17V SOT23-6", Direction=Unidirectional, Height=1.45mm, Interface=USB,Ethernet,Other, Lead Free=Yes, Manufacturer Part Number=USBLC6-4SC6, Mouser Description="USBLC6 Series 4 Line 6 V Uni / Bi-Directional ESD Protection - SOT-23-6", Number Of Channels=4, Octopart=https://octopart.com/usblc6-4sc6-stmicroelectronics-347147, RoHS=TRUE, Standoff Height=0mm, Temperature Range High=+125°C
FB1: library part MMZ0603F330CT000, "FERRITE BEAD 33 OHM 0201 1LN", Current Rating (Max)=150mA, DC Resistance (DCR) (Max)=1.3Ohm, Device Package="0201 (0603 Metric)", manufacturer="TDK Corporation", Operating Temperature="-55°C ~ 125°C", Supplier Part Number 1=445-7792-1-ND, componentlink1description=Datasheet, componentlink1url=https://product.tdk.com/info/en/catalog/datasheets/beads_commercial_signal_mmz0603_en.pdf?ref_disty=digikey, componentlink2description="DigiKey Link", componentlink2url=https://www.digikey.com/en/products/detail/tdk-corporation/MMZ0603F330CT000/2747662, Filter Type="Signal Line", Height (Max)="0.013\" (0.33mm)", Impedance @ Frequency="33 Ohms @ 100 MHz", lastupdated="3/11/2024 7:42:01 AM", Lifecycle Status=Active, Minimum Order=1, Mounting Type="Surface Mount", Number of Lines=1, Package / Case="0201 (0603 Metric)", packaging=TapeAndReel, Part Number=MMZ0603F330CT000, Part Status=Active, partid=1, price=0.03, series=MMZ, Size / Dimension="0.024\" L x 0.012\" W (0.60mm x 0.30mm)", Supplier 1=DigiKey
IC1: "IC REG LIN 3.3V 150MA SOT23R-3", Current - Output=150mA, Current - Quiescent (Iq)="75 µA", Current - Supply (Max)="85 µA", manufacturer="Diodes Incorporated", Operating Temperature="-40°C ~ 85°C", Package / Case="TO-236-3, SC-59, SOT-23-3", Supplier Device Package=SOT23R, Supplier Part Number=511-STM32F411CEU6, Supplier Part Number 1=AP7313-33SRG-7DICT-ND, Voltage - Input (Max)=6V, Voltage - Output (Min/Fixed)=3.3V, Voltage Dropout (Max)="0.3V @ 150mA", componentlink1description=Datasheet, componentlink1url=https://www.diodes.com/assets/Datasheets/AP7313.pdf, componentlink2description="DigiKey Link", componentlink2url=https://www.digikey.com/en/products/detail/diodes-incorporated/AP7313-33SRG-7/2270807, lastupdated="3/11/2024 8:03:47 AM", Lifecycle Status=Active, Minimum Order=1, Mounting Type="Surface Mount", Number of Regulators=1, Output Configuration=Positive, Output Type=Fixed, packaging=TapeAndReel, Part Number=AP7313-33SRG-7, Part Status=Active, price=0.08, Protection Features="Over Current, Over Temperature, Short Circuit", PSRR="65dB (100Hz)", series=-, Supplier=Mouser, Supplier 1=DigiKey
J1: "CONN RCPT USB2.0 MICRO B SMD R/A", Current Rating (Amps)="1.8A per Contact", manufacturer="Amphenol ICC (FCI)", Operating Temperature="-30°C ~ 80°C", Supplier Part Number 1=609-4616-2-ND, Voltage - Rated=100VAC, componentlink1description=Datasheet, componentlink1url=https://cdn.amphenol-icc.com/media/wysiwyg/files/documentation/datasheet/inputoutput/io_usb_micro.pdf, componentlink2description="DigiKey Link", componentlink2url=//digikey.com/product-detail/en/amphenol-icc-fci/10118193-0001LF/609-4616-2-ND/2785388, Connector Type="USB - micro B", Features="Solder Retention", Gender=Receptacle, lastupdated="12/9/2019 8:51:28 PM", Lifecycle Status=0, Mating Cycles=10000, Minimum Order=1, Mounting Feature=Horizontal, Mounting Type="Surface Mount, Right Angle; Through Hole", Number of Contacts=5, Number of Ports=1, packaging=TapeAndReel, Part Number=10118193-0001LF, Part Status=Active, price=0.21, series=-, Shielding=Shielded, Specifications="USB 2.0", Supplier 1=DigiKey, Termination=Solder
J2: "CONN HEADER R/A 12POS 2.54MM", Current Rating (Amps)="3A per Contact", Insulation Color=Black, manufacturer="Harwin Inc.", Material Flammability Rating="UL94 V-0", Operating Temperature="-40°C ~ 105°C", Supplier Part Number 1=952-3288-ND, componentlink1description=Datasheet, componentlink1url=https://cdn.harwin.com/pdfs/Harwin_PC_Connectors_M20.pdf, componentlink2description="DigiKey Link", componentlink2url=https://www.digikey.com/en/products/detail/harwin-inc/M20-9961245/3921062, Connector Type="Header, Cuttable", Contact Finish - Mating=Gold, Contact Length - Mating="0.240\" (6.10mm)", Contact Length - Post="0.118\" (3.00mm)", Contact Material=Brass, Contact Shape=Square, Contact Type="Male Pin", Fastening Type=Push-Pull, Insulation Height="0.100\" (2.54mm)", Insulation Material="Polyamide (PA6T), Nylon 6T", lastupdated="9/21/2022 7:24:59 PM", Lifecycle Status=Active, Minimum Order=1, Mounting Type="Through Hole, Right Angle", Number of Positions=12, Number of Positions Loaded=All, Number of Rows=1, packaging=Bulk, Part Number=M20-9961245, Part Status=Active, partid=173, Pitch - Mating="0.100\" (2.54mm)", price=0.31, Row Spacing - Mating="-40°C ~ 105°C", series=M20, Shrouding=Unshrouded, Style="Board to Board or Cable", Supplier 1=DigiKey, Termination=Solder
J3: "CONN HEADER VERT 6POS 2MM", Current Rating (Amps)=2A, Insulation Color=Ivory, manufacturer="JST Sales America Inc.", Material Flammability Rating="UL94 V-0", Operating Temperature="-25°C ~ 85°C", Supplier Part Number 1=455-2923-ND, Voltage Rating=100V, componentlink1description=Datasheet, componentlink1url=http://www.jst-mfg.com/product/pdf/eng/ePH.pdf, componentlink2description="DigiKey Link", componentlink2url=http://digikey.com/product-detail/en/jst-sales-america-inc/B6B-PH-K-LF-SN/455-2923-ND/2741628, Connector Type=Header, Contact Finish - Mating=Tin, Contact Finish - Post=Tin, Contact Length - Mating="0.130\" (3.30mm)", Contact Length - Post="0.134\" (3.40mm)", Contact Material=Brass, Contact Shape=Square, Contact Type="Male Pin", Fastening Type="Detent Lock", Insulation Height="0.236\" (6.00mm)", Insulation Material="Polyamide (PA66), Nylon 6/6", lastupdated="1/12/2020 10:30:17 PM", Lifecycle Status=Active, Minimum Order=1, Mounting Type="Through Hole", Number of Positions=6, Number of Positions Loaded=All, Number of Rows=1, Overall Contact Length="0.333\" (8.45mm)", packaging=Bulk, Part Number=B6B-PH-K(LF)(SN), Part Status=Active, partid=29, Pitch - Mating="0.079\" (2.00mm)", price=0.34, series=PH, Shrouding="Shrouded - 4 Wall", Style="Board to Cable/Wire", Supplier 1=DigiKey, Termination="Press-Fit, Solder"
PWR: library part 150060RS86000, "WL-SMCW SMT MONO-COLOR CHIP LED", Current - Test=20mA, Device Package="0603 (1608 Metric)", Lens Color=Colorless, manufacturer="Würth Elektronik", Millicandela Rating=800mcd, Supplier Device Package=0603, Supplier Part Number 1=732-150060RS86000CT-ND, Voltage - Forward (Vf) (Typ)=2V, Color=Red, componentlink1description=Datasheet, componentlink1url=https://www.we-online.com/catalog/datasheet/150060RS86000.pdf, componentlink2description="DigiKey Link", componentlink2url=https://www.digikey.com/en/products/detail/würth-elektronik/150060RS86000/12371435, Height (Max)=1.05mm, lastupdated="3/11/2024 7:52:02 AM", Lens Size="0.70mm Dia", Lens Style="Round with Domed Top", Lens Transparency=Clear, Lifecycle Status=Active, Minimum Order=1, Mounting Type="Surface Mount", Package / Case="0603 (1608 Metric)", packaging=TapeAndReel, Part Number=150060RS86000, Part Status=Active, partid=1069, price=0.23, series=WL-SMCW, Size / Dimension="1.60mm L x 0.80mm W", Supplier 1=DigiKey, Viewing Angle=40°, Wavelength - Dominant=624nm, Wavelength - Peak=632nm
R1: library part 3430A2F1K0TDF, "3430 A2 1% 1K0 100PPM 1K RL", Device Package="0805 (2012 Metric)", manufacturer="TE Connectivity Passive Product", Operating Temperature="-55°C ~ 155°C", Power (Watts)=1W, Ratings=AEC-Q200, Supplier Device Package=0508, Supplier Part Number 1=1712-3430A2F1K0TDFCT-ND, Temperature Coefficient=±100ppm/°C, Tolerance=±1%, componentlink2description="DigiKey Link", componentlink2url=https://www.digikey.com/en/products/detail/te-connectivity-passive-product/3430A2F1K0TDF/17764297, Composition="Thick Film", Features="Automotive AEC-Q200", Height - Seated (Max)="0.026\" (0.65mm)", lastupdated="2/8/2024 9:00:04 PM", Lifecycle Status=Active, Minimum Order=1, Number of Terminations=2, Package / Case="0805 (2012 Metric)", packaging=TapeAndReel, Part Number=3430A2F1K0TDF, Part Status=Active, partid=77520, price=0.02, Resistance="1 kOhms", series=3430, Size / Dimension="0.049\" L x 0.079\" W (1.25mm x 2.00mm)", Supplier 1=DigiKey
R2 R3: library part RQ73C1E4K75BTD, "RES 4.75 KOHMS 0.1% 1/16W 0402", Device Package="0402 (1005 Metric)", manufacturer="TE Connectivity Passive Product", Operating Temperature="-55°C ~ 155°C", Power (Watts)="0.063W, 1/16W", Ratings=AEC-Q200, Resistance="4.75 kOhms", Supplier Device Package=0402, Supplier Part Number 1=A139791CT-ND, Temperature Coefficient=±10ppm/°C, Tolerance=±0.1%, componentlink1description=Datasheet, componentlink1url=//media.digikey.com/pdf/Data%20Sheets/Tyco%20Electronics%20P%20B%20PDFs/RQ73-0618%20v2.pdf, componentlink2description="DigiKey Link", componentlink2url=https://www.digikey.com/en/products/detail/te-connectivity-passive-product/RQ73C1E4K75BTD/9479739, Composition="Thin Film", Features="Anti-Sulfur, Automotive AEC-Q200", Height - Seated (Max)="0.016\" (0.40mm)", lastupdated="2/9/2024 8:30:17 PM", Lifecycle Status=Active, Minimum Order=1, Number of Terminations=2, Package / Case="0402 (1005 Metric)", packaging=TapeAndReel, Part Number=RQ73C1E4K75BTD, Part Status=Active, partid=4266, price=0.27, series=RQ73, Size / Dimension="0.039\" L x 0.020\" W (1.00mm x 0.50mm)", Supplier 1=DigiKey
R4 R6 R7 R8 R9 R10 R11 R12 R13 R14 R15 R16: library part RA73F1J150RBTD, "RA73F 1J 150R 0.1% 5K RL", Device Package="0603 (1608 Metric)", manufacturer="TE Connectivity Passive Product", Operating Temperature="-55°C ~ 155°C", Power (Watts)="0.5W, 1/2W", Resistance="150 Ohms", Supplier Device Package=0603, Supplier Part Number 1=1712-RA73F1J150RBTDCT-ND, Temperature Coefficient=25ppm/°C, Tolerance=±0.1%, componentlink1description=Datasheet, componentlink1url=https://www.te.com/commerce/DocumentDelivery/DDEController?Action=srchrtrv&DocNm=1773270-3&DocType=DS&DocLang=English, componentlink2description="DigiKey Link", componentlink2url=https://www.digikey.com/en/products/detail/te-connectivity-passive-product/RA73F1J150RBTD/16030954, Composition="Thin Film", Height - Seated (Max)="0.023\" (0.58mm)", lastupdated="2/9/2024 8:40:58 PM", Lifecycle Status=Active, Minimum Order=1, Number of Terminations=2, Package / Case="0603 (1608 Metric)", packaging=TapeAndReel, Part Number=RA73F1J150RBTD, Part Status=Active, partid=71668, price=0.36, series=RA73, Size / Dimension="0.061\" L x 0.031\" W (1.55mm x 0.80mm)", Supplier 1=DigiKey
R5: library part SG73G1JTTD1002D, "RES 10K OHM 0.5% 1/3W 0603", Device Package="0603 (1608 Metric)", manufacturer="KOA Speer Electronics, Inc.", Operating Temperature="-55°C ~ 155°C", Power (Watts)="0.333W, 1/3W", Ratings=AEC-Q200, Resistance="10 kOhms", Supplier Device Package=0603, Supplier Part Number 1=2019-SG73G1JTTD1002DCT-ND, Temperature Coefficient=±50ppm/°C, Tolerance=±0.5%, componentlink1description=Datasheet, componentlink1url=https://www.koaspeer.com/pdfs/SG73G.pdf, componentlink2description="DigiKey Link", componentlink2url=https://www.digikey.com/en/products/detail/koa-speer-electronics-inc/SG73G1JTTD1002D/16825550, Composition="Thick Film", Features="Automotive AEC-Q200, Moisture Resistant, Pulse Withstanding", Height - Seated (Max)="0.022\" (0.55mm)", lastupdated="2/9/2024 8:40:53 PM", Lifecycle Status=Active, Minimum Order=1, Number of Terminations=2, Package / Case="0603 (1608 Metric)", packaging=TapeAndReel, Part Number=SG73G1JTTD1002D, Part Status=Active, partid=70977, price=0.04, series=SG73G, Size / Dimension="0.063\" L x 0.031\" W (1.60mm x 0.80mm)", Supplier 1=DigiKey
R17: library part ERJ-PA2F1500X, "RES 150 OHM 1% 1/4W 0402", Device Package="0402 (1005 Metric)", manufacturer="Panasonic Electronic Components", Operating Temperature="-55°C ~ 155°C", Power (Watts)="0.25W, 1/4W", Ratings=AEC-Q200, Resistance="150 Ohms", Supplier Device Package=0402, Supplier Part Number 1=P17219CT-ND, Temperature Coefficient=±100ppm/°C, Tolerance=±1%, componentlink1description=Datasheet, componentlink1url=https://industrial.panasonic.com/cdbs/www-data/pdf/RDO0000/AOA0000C331.pdf, componentlink2description="DigiKey Link", componentlink2url=https://www.digikey.com/en/products/detail/panasonic-electronic-components/ERJ-PA2F1500X/5402645, Composition="Thick Film", Features="Automotive AEC-Q200, Pulse Withstanding", Height - Seated (Max)="0.016\" (0.40mm)", lastupdated="2/9/2024 8:30:02 PM", Lifecycle Status=Active, Minimum Order=1, Number of Terminations=2, Package / Case="0402 (1005 Metric)", packaging=TapeAndReel, Part Number=ERJ-PA2F1500X, Part Status=Active, partid=7858, price=0.02, series=ERJ-PA2, Size / Dimension="0.039\" L x 0.020\" W (1.00mm x 0.50mm)", Supplier 1=DigiKey
R18: library part ERJ-U02D1001X, "0402 ANTI-SULFUR RES. , 0.5%, 1K", Device Package="0402 (1005 Metric)", manufacturer="Panasonic Electronic Components", Operating Temperature="-55°C ~ 155°C", Power (Watts)="0.1W, 1/10W", Ratings=AEC-Q200, Resistance="1 kOhms", Supplier Device Package=0402, Supplier Part Number 1=10-ERJ-U02D1001XCT-ND, Temperature Coefficient=±200ppm/°C, Tolerance=±0.5%, componentlink1description=Datasheet, componentlink1url=https://industrial.panasonic.com/cdbs/www-data/pdf/RDP0000/AOA0000C334.pdf, componentlink2description="DigiKey Link", componentlink2url=https://www.digikey.com/en/products/detail/panasonic-electronic-components/ERJ-U02D1001X/9365326, Composition="Thick Film", Features="Anti-Sulfur, Automotive AEC-Q200", Height - Seated (Max)="0.016\" (0.40mm)", lastupdated="2/9/2024 8:28:26 PM", Lifecycle Status=Active, Minimum Order=1, Number of Terminations=2, Package / Case="0402 (1005 Metric)", packaging=TapeAndReel, Part Number=ERJ-U02D1001X, partid=81776, price=0.01, series=ERJ-U02, Size / Dimension="0.039\" L x 0.020\" W (1.00mm x 0.50mm)", Supplier 1=DigiKey
SW1: library part CMP-2000-07511-1, "FSMSM Push Button Switch, 50 mA, -35 to 85 degC, 2-Pin SMD, RoHS, Bulk", Case\/Package=SMD/SMT, Contact Current Rating=50mA, Contact Resistance=100mOhm, manufacturer="TE Connectivity", Max Operating Temperature=85degC, Max Voltage Rating (DC)=12V, Min Operating Temperature=-35degC, Operating Force=180gf, Package Description="2-Pin Surface Mount Device, Body 6 x 3.5 mm, Pitch 9.19 mm", Package Quantity=1000, Voltage Rating (DC)=24V, Actuator Length=1.07mm, Actuator Material=Polyamide, Contact Material=Brass, Contact Plating=Silver, Current Rating=50mA, Datasheet URL=http://www.te.com/commerce/DocumentDelivery/DDEController?Action=showdoc&DocId=Customer+Drawing%7F1437566-3%7FC2%7Fpdf%7FEnglish%7FENG_CD_1437566-3_C2_1437566_3_1_c.dwg.pdf%7F1437566-3, Datasheet Version="Rev. C2, 08/2014", Electrical Life=20000Cycles, ELV=Compliant, Illumination Type=Illuminated, Lead Free=LeadFree, Manufacturer URL=http://www.te.com/, Mechanical Life=20000Cycles, Mount=SurfaceMount, Mounting Technology=SurfaceMount, Orientation=Straight, Package Reference=FSMSM, packaging=LoosePiece, REACH SVHC=Unknown, RoHSCompliant=true, Switch Travel=0.25mm, Termination=GullWing, Throw Configuration=SPST
U1: library part CMP-0243-00165-1, "ARM Cortex-M4 32-bit MCU+FPU, 512 KB Flash, 128 KB RAM, 36 I/Os, 48-Pin UFQFPN, -40 to 85 degC, Tray", I/Os (High Current)=36, Operating Frequency(F) (Processor speed) (MHz)=100, Package Description=UFQFPN48, Package Reference="48-Pin Ultra Thin Fine Pitch Quad Flat No-Lead, 7 x 7 x 0.6 mm Body, 0.5 mm Pitch, Exposed Pad", Supply Voltage(Vcc) min (V)=1.7, componentlink1description="Manufacturer URL", componentlink1url=http://www.st.com/, componentlink2description=Datasheet, componentlink2url=http://www.st.com/st-web-ui/static/active/en/resource/technical/document/datasheet/DM00115249.pdf, Core="ARM Cortex-M4", DatasheetVersion="Rev. 6", FLASH Size (Prog) (kB)=512, Internal RAM Size (kB)=128, Mounting Technology="Surface Mount", Packing=Tray
U2: library part CMP-1753-00002-2, "3-Axis Gyroscope, Accelerometer and a Digital Motion Processor(TM) (DMP), 2.375 to 3.46 V, -40 to 85 degC, 24-Pin QFN, RoHS, Tape and Reel", manufacturer=InvenSense, Standard Package=5,000, Category=Sensors,Transducers, Datasheet URL=http://datasheet.octopart.com/MPU-6050-InvenSense-datasheet-14421344.pdf, Datasheet Version="Rev. 3.3, 05/2012", Dynamic Catalog=MPU-6000™Series, Family=Multifunction, Featured Product=MPU-60506-Axis,IntegratedI²CSolution, Manufacturer URL=http://www.invensense.com/, Online Catalog=MPU-6000™Series, Other Names="1428-1007-2 / MPU6050", Output Type=Digital, Sensor Type=MotionTracking, Unit PriceUSD=Digital
U3 U4 U5: library part CMP-1061-00170-1, "Quad Monolithic Common Anode, Transient Voltage Suppressor for ESD Protection, 6-Pin SC-74, Pb-Free, Tape and Reel", manufacturer="On Semiconductor", componentlink1description="Manufacturer URL", componentlink1url=http://www.onsemi.com/, componentlink2description=Datasheet, componentlink2url=http://www.onsemi.com/pub_link/Collateral/MMQA-D.PDF, ComponentLink3Description="Package Specification", ComponentLink3URL=http://www.onsemi.com/pub_link/Collateral/318F-05.PDF, DatasheetVersion="Rev. 10", Direction=Unidirectional, IR Max (uA)=0.7, Mounting Technology="Surface Mount", PackageDescription="6-Pin Small Outline Transistor, Body 3 x 1.5 mm, Pitch 0.95 mm", PackageReference=SC-74-6-318F-05, PackageVersion="Rev. N, 06/2012", Packing="Tape and Reel", PartNumber=MMQA6V2T1G, RoHS=Pb-Free, V(BR) Typ (V)=6.2
Y1: library part CX2016DB20000D0FLJCC, "CRYSTAL 20.0000MHZ 8PF SMD", ESR (Equivalent Series Resistance)="150 Ohms", Frequency Stability=±15ppm, Frequency Tolerance=±10ppm, Load Capacitance=8pF, manufacturer="Kyocera International Inc. Electronic Components", Operating Mode=Fundamental, Operating Temperature="-30°C ~ 85°C", Package / Case="4-SMD, No Lead", Supplier Part Number 1=1253-1349-1-ND, componentlink1description=Datasheet, componentlink1url=//media.digikey.com/pdf/Data%20Sheets/Optrex%20PDFs/CX2016DB_Series_Spec.pdf, componentlink2description="DigiKey Link", componentlink2url=http://digikey.com/product-detail/en/kyocera-international-inc-electronic-components/CX2016DB20000D0FLJCC/1253-1349-1-ND/4896439, Frequency=20MHz, Height - Seated (Max)="0.018\" (0.45mm)", lastupdated="3/11/2024 7:54:31 AM", Lifecycle Status=Active, Minimum Order=1, Mounting Type="Surface Mount", packaging=TapeAndReel, Part Number=CX2016DB20000D0FLJCC, Part Status=Active, partid=474, price=0.48, series="CX2016DB, Kyocera", Size / Dimension="0.079\" L x 0.063\" W (2.00mm x 1.60mm)", Supplier 1=DigiKey, Type="MHz Crystal"

## Free pads (board coordinates)
  round 1.524 hole 2: 2(121.92,96.647) 2(121.92,133.731) 2(122.58,109.22) 2(170.637,107.188) 2(171.069,96.52) 2(171.069,133.731)

## Via types
v1: diameter 0.7, hole 0.3, Top Layer to Bottom Layer, 98 vias

## Nets (pads, with @x,y where several pads share a name; then routed paths per layer and width w, separated by ;. In a path a pad name is that pad's centre, name@x,y a point inside that pad or via, vN(x,y) a via of type N, cw(c..) or ccw(c..) an arc to the next point about the centre after c; other vN are vias at no path point)
+3.3: C5.1 C7.1 C8.1 C9.1 C10.1 C11.1 C12.1 C18.1 IC1.2 J3.1 R1.1 R2.1 R3.1 U1.1 U1.9 U1.24 U1.36 U1.48 U2.13 | length 85.5
  Top Layer w0.254: v1(128.778,108.585) 128.851,108.658 134.82,108.658 140.142,113.98 U1.9 ; 140.589,117.983 140.592,117.98 U1.1 ; 141.859,119.38 142.028,119.211 142.028,118.632 U1.48 ; U1.24 147.53,111.169 147.701,110.998 ; U1.36 149.095,117.98 149.098,117.983
  Top Layer w0.35: U2.13 134.652,125.698 134.747,125.603 ; v1(139.446,118.364) 139.513,118.297 140.275,118.297 140.589,117.983 ; 141.605,119.634 141.859,119.38 ; 147.701,110.998 148.082,110.998
  Top Layer w0.45: 134.747,125.603 135.001,125.349 ; 148.082,110.998 148.59,110.998 ; 149.098,117.983 149.284,117.983 149.792,118.491 v1(149.86,118.491)
  Top Layer w0.454: 141.351,119.888 141.605,119.634
  Top Layer w0.55: 135.001,125.349 135.04,125.31 135.04,124.762 C18.1 ; v1(140.716,120.523) 141.351,119.888 ; 148.59,110.998 149.225,110.998
  Top Layer w0.65: 149.225,110.998 149.429,110.794 149.429,110.246 v1(149.439,110.236) ; IC1.2 163.002,118.7 163.174,118.872 C5.1 165.15,118.872 166.36,117.662 166.36,117.231 v1(166.37,117.221)
  Top Layer w0.7: C8.1 C7.1 137.755,118.364 v1(139.446,118.364) ; v1(140.716,120.523) 141.057,120.864 C10.1 ; R2.1 R3.1 150.113,130.242 151.448,131.577 J3.1 ; C9.1 149.098,109.895 v1(149.439,110.236) ; v1(149.86,118.491) 153.837,118.491 C11.1
  Top Layer w0.8: v1(132.842,124.587) C18.1 ; v1(168.529,129.921) 169.545,128.905 R1.1
  Bottom Layer w0.8: v1(128.778,108.585) 124.46,112.903 124.46,114.427 130.556,120.523 v1(140.716,120.523)
+5: C2.2 C4.1 D3.5 FB1.1 IC1.3 | length 21
  Top Layer w0.3: IC1.3 162.052,121.539 162.814,122.301 167.767,122.301 168.889,121.179 FB1.1
  Top Layer w0.5: IC1.3@162.052,120.6 162.052,118.184 162.981,117.256 163.629,117.256 164.408,116.477 164.408,116.261 164.658,116.011 D3.5
  Top Layer w0.7: C2.2 C4.1 159.12,120.55 162.002,120.55 IC1.3@162.052,120.6
BOOT0: R5.2 U1.44 | length 21.3
  Top Layer w0.254: v1(141.859,125.984) 144.03,123.813 U1.44 ; R5.2 152.146,122.077 v1(152.146,123.952)
  Bottom Layer w0.254: v1(141.859,125.984) 143.315,125.984 144.331,124.968 151.13,124.968 v1(152.146,123.952)
CPOUT: C17.1 U2.20 | length 1.9
  Top Layer w0.35: U2.20 138.664,127.615 138.684,127.635
  Top Layer w0.45: 138.684,127.635 139.613,127.635 C17.1
GND: C1.2 C2.1 C3.1 C4.2 C5.2 C6.2 C7.2 C8.2 C9.2 C10.2 C11.2 C12.2 C13.2 C14.2 C15.2 C16.2 C17.2 C18.2 D3.2 IC1.1 J1.5 J3.6 pad.2 PWR.2 R5.1 R18.2 SW1.2 U1.8 U1.23 U1.35 U1.47 U1.49 U2.1 U2.9 U2.11 U2.18 U3.2 U3.5 U4.2 U4.5 U5.2 U5.5 Y1.2 Y1.4 | length 158
  Top Layer w0.25: U2.11 133.219,127.615 132.635,127.031 131.897,127.031 C15.2 130.215,126.706 129.794,127.127 v1(129.794,129.667) 130.338,129.123 132.457,129.123 132.887,128.693 133.197,128.693 133.225,128.665 133.877,128.665 U2.9 ; U2.1 137.152,130.59 138.642,132.08 139.064,132.502 139.487,132.502 v1(139.573,132.588)
  Top Layer w0.254: U1.8 142.23,114.48 v1(142.58,114.13) ; U1.47 142.53,119.289 142.621,119.38 ; v1(146.98,117.43) 147.03,117.48 U1.35 ; U1.23 147.03,110.653 147.066,110.617
  Top Layer w0.35: U2.18 137.152,125.611 138.176,124.587 ; 142.621,119.38 142.875,119.634 ; 147.066,110.617 147.412,110.271 147.532,110.271 147.693,110.109 v1(147.788,110.109) ; v1(154.178,108.204) R18.2
  Top Layer w0.4: v1(167.259,120.523) 167.259,115.637 167.493,115.403 J1.5
  Top Layer w0.45: v1(142.494,120.396) 142.494,120.328 142.875,119.947 142.875,119.634
  Top Layer w0.6: v1(161.798,111.506) 164.084,111.506 164.658,112.08 D3.2
  Top Layer w0.7: v1(127.66,102.108) U3.2 U3.5 ; C18.2 138.176,124.587 v1(138.811,124.587) 138.811,125.359 139.65,126.198 C17.2 ; v1(140.589,102.743) 141.224,102.108 U4.2 U4.5 ; C10.2 142.407,120.483 v1(142.494,120.396) ; C1.2 146.034,108.482 147.725,108.482 C9.2 147.748,110.069 v1(147.788,110.109) ; C12.2 C11.2 ; U5.2 U5.5 v1(164.287,102.108) ; J3.6 161.448,131.453 164.997,127.904 PWR.2
  Top Layer w0.8: SW1.2 125.349,131.953 v1(125.603,132.207) ; v1(128.27,114.554) 131.468,114.554 131.48,114.542 131.53,114.542 Y1.2 ; C13.2 131.149,116.209 Y1.2@131.149,114.923 ; Y1.4 132.63,113.042 132.88,112.792 C14.2@132.88,111.175 ; C14.2 C14.2@132.88,111.175 ; C16.2 138.642,132.08 ; v1(134.613,111.767) 134.27,111.425 133.13,111.425 C14.2@132.88,111.175 ; C8.2 C7.2 139.359,116.927 v1(139.446,116.84) ; v1(137.147,113.17) 137.147,113.642 137.832,114.327 137.832,114.377 C6.2 ; R5.1 153.416,121.997 153.441,121.972 153.455,121.972 153.924,121.503 C11.2 153.974,119.878 155.019,119.878 155.813,119.084 156.341,119.084 C2.1 C4.2 159.138,118.7 161.102,118.7 IC1.1 161.102,117.028 v1(161.163,116.967) ; v1(161.798,111.506) 161.798,111.48 163.754,109.524 C3.1 ; C5.2 167.208,120.472 v1(167.259,120.523)
  Bottom Layer w0.25: v1(138.811,124.587) 139.573,125.349 v1(139.573,132.588)
  Bottom Layer w0.7: v1(140.589,102.743) 140.589,104.648 141.351,105.41 141.351,107.823 143.637,110.109 v1(147.788,110.109)
  Bottom Layer w0.8: v1(125.603,132.207) 127.254,132.207 v1(129.794,129.667) ; v1(128.27,114.554) 131.826,114.554 v1(134.613,111.767) ; v1(137.147,113.17) 137.147,113.336 137.414,113.603 137.414,114.808 v1(139.446,116.84)
  other v1: 163.551,95.199 165.087,95.199 166.624,95.199 125.527,95.555 127.063,95.555 128.6,95.555 163.551,96.545 165.087,96.545 166.624,96.545 125.527,96.901 127.063,96.901 128.6,96.901 163.551,97.892 165.087,97.892 166.624,97.892 125.527,98.247 127.063,98.247 128.6,98.247 142.58,113.03 143.68,113.03 144.78,113.03 145.88,113.03 146.98,113.03 143.68,114.13 144.78,114.13 145.88,114.13 146.98,114.13 142.58,115.23 143.68,115.23 144.78,115.23 145.88,115.23 146.98,115.23 142.58,116.33 143.68,116.33 144.78,116.33 145.88,116.33 146.98,116.33 142.58,117.43 143.68,117.43 144.78,117.43 145.88,117.43
I2C1_SCL: R3.2 U1.42 U2.23 | length 19.6
  Top Layer w0.254: U2.23 140.458,129.115 141.811,127.762 145.415,127.762 145.923,128.27 ; U1.42 145.03,125.98 145.923,126.873 145.923,128.27 ; R3.2 145.923,128.27
I2C1_SDA: R2.2 U1.43 U2.24 | length 18.1
  Top Layer w0.254: U2.24 140.768,129.615 141.291,129.092 R2.2 143.036,129.125 144.492,129.125 v1(144.526,129.159) ; v1(143.764,126.492) 144.53,125.726 U1.43
  Bottom Layer w0.254: v1(143.764,126.492) 144.526,127.254 v1(144.526,129.159)
MCU_PWR_LED: D2.2 R18.1 | length 2.3
  Top Layer w0.35: D2.2 151.92,110.91 154.15,110.91 R18.1
MPU_INT: U1.45 U2.12 | length 24.4
  Top Layer w0.254: U2.12 133.677,127.115 133.629,127.067 133.629,126.817 131.318,124.506 131.318,122.196 131.467,122.047 138.43,122.047 140.462,124.079 143.002,124.079 143.53,123.551 U1.45
NetC3_2: C3.2 FB1.2 J1.1 | length 14.3
  Top Layer w0.3: C3.2 165.354,110.871 167.286,112.803 J1.1 168.54,112.822 169.464,112.822 169.799,113.157 169.799,119.253 169.439,119.613 FB1.2
NetC14_1: C14.1 R17.1 Y1.3 | length 9.5
  Top Layer w0.6: Y1.3 131.53,113.042 131.28,112.792 C14.1 131.63,110.775 131.63,110.389 132.044,109.975 134.093,109.975 136.017,111.899 R17.1
NetC16_1: C16.1 U2.8 | length 4.3
  Top Layer w0.25: 132.588,129.667 133.112,129.143 133.899,129.143 U2.8
  Top Layer w0.35: 132.207,130.048 132.588,129.667
  Top Layer w0.45: 131.826,130.429 132.207,130.048
  Top Layer w0.55: 131.826,130.429 131.826,131.991 C16.1
NetD1_1: PWR.1 R1.2 | length 3.1
  Top Layer w0.8: PWR.1 166.737,124.474 R1.2
NetD2_1: D2.1 U1.28 | length 4.4
  Top Layer w0.254: U1.28 150.295,113.98 D2.1
NetJ2_1: J2.1 R4.1 U3.1 | length 13.2
  Top Layer w0.7: v1(132.461,106.172) 131.535,105.246 131.535,104.342 R4.1 131.46,104.217 131.535,104.142 132.186,104.142 133.27,103.058 U3.1
  Bottom Layer w0.7: J2.1 132.334,106.045 v1(132.461,106.172)
NetJ2_2: J2.2 R6.1 U3.3 | length 6.3
  Top Layer w0.7: R6.1 132.846,100.584 133.27,101.008 133.27,101.158 U3.3 133.42,99.244 J2.2
NetJ2_3: J2.3 R7.1 U3.4 | length 5.2
  Top Layer w0.7: U3.4 135.97,101.158 135.97,101.008 136.394,100.584 R7.1 137.78,100.534 137.414,100.168 J2.3
NetJ2_4: J2.4 R8.1 U3.6 | length 16.8
  Top Layer w0.7: U3.6 135.97,103.058 137.054,104.142 137.72,104.142 137.795,104.217 R8.1 137.795,106.807 v1(137.16,107.442)
  Bottom Layer w0.7: v1(137.16,107.442) 137.16,104.189 139.954,101.395 J2.4
NetJ2_5: J2.5 R9.1 U4.1 | length 13.2
  Top Layer w0.7: R9.1 143.413,104.217 143.488,104.142 144.124,104.142 145.208,103.058 U4.1 145.358,105.099 v1(145.415,105.156)
  Bottom Layer w0.7: J2.5 142.494,102.235 v1(145.415,105.156)
NetJ2_6: J2.6 R10.1 U4.3 | length 6
  Top Layer w0.7: J2.6 144.856,97.968 144.856,99.365 143.762,100.459 143.458,100.459 143.383,100.534 R10.1 144.784,100.584 145.208,101.008 145.208,101.158 U4.3
NetJ2_7: J2.7 R11.1 U4.4 | length 5.8
  Top Layer w0.7: J2.7 147.574,101.124 147.608,101.158 U4.4 147.908,101.158 147.908,101.008 148.332,100.584 R11.1
NetJ2_8: J2.8 R12.1 U4.6 | length 14.8
  Top Layer w0.7: v1(146.812,105.664) 147.758,104.718 U4.6 147.908,103.058 148.992,104.142 149.546,104.142 149.621,104.217 R12.1
  Bottom Layer w0.7: v1(146.812,105.664) 146.558,105.41 146.558,101.346 J2.8
NetJ2_9: J2.9 R13.1 U5.1 | length 13.9
  Top Layer w0.7: R13.1 155.209,104.09 155.284,104.015 156.189,104.015 157.146,103.058 157.226,103.058 v1(157.226,105.156)
  Bottom Layer w0.7: J2.9 157.226,102.362 v1(157.226,105.156)
NetJ2_10: J2.10 R14.1 U5.3 | length 5.2
  Top Layer w0.7: J2.10 155.202,97.798 155.202,100.576 R14.1 156.684,100.584 157.146,101.046 157.146,101.158 U5.3
NetJ2_11: J2.11 R15.1 U5.4 | length 6.6
  Top Layer w0.7: J2.11 159.696,99.752 U5.4 159.846,101.158 159.846,101.046 160.308,100.584 R15.1